# Altium PCB uku20710_pow.PcbDoc
Units mm, origin at the board's own origin, x right, y up, seen from the top; angles counter-clockwise.
Board outline 334.15 x 155.4 mm, 2 copper layers (Top Layer, Bottom Layer); 83 components, 590 nets, 251 pads, 79 vias.
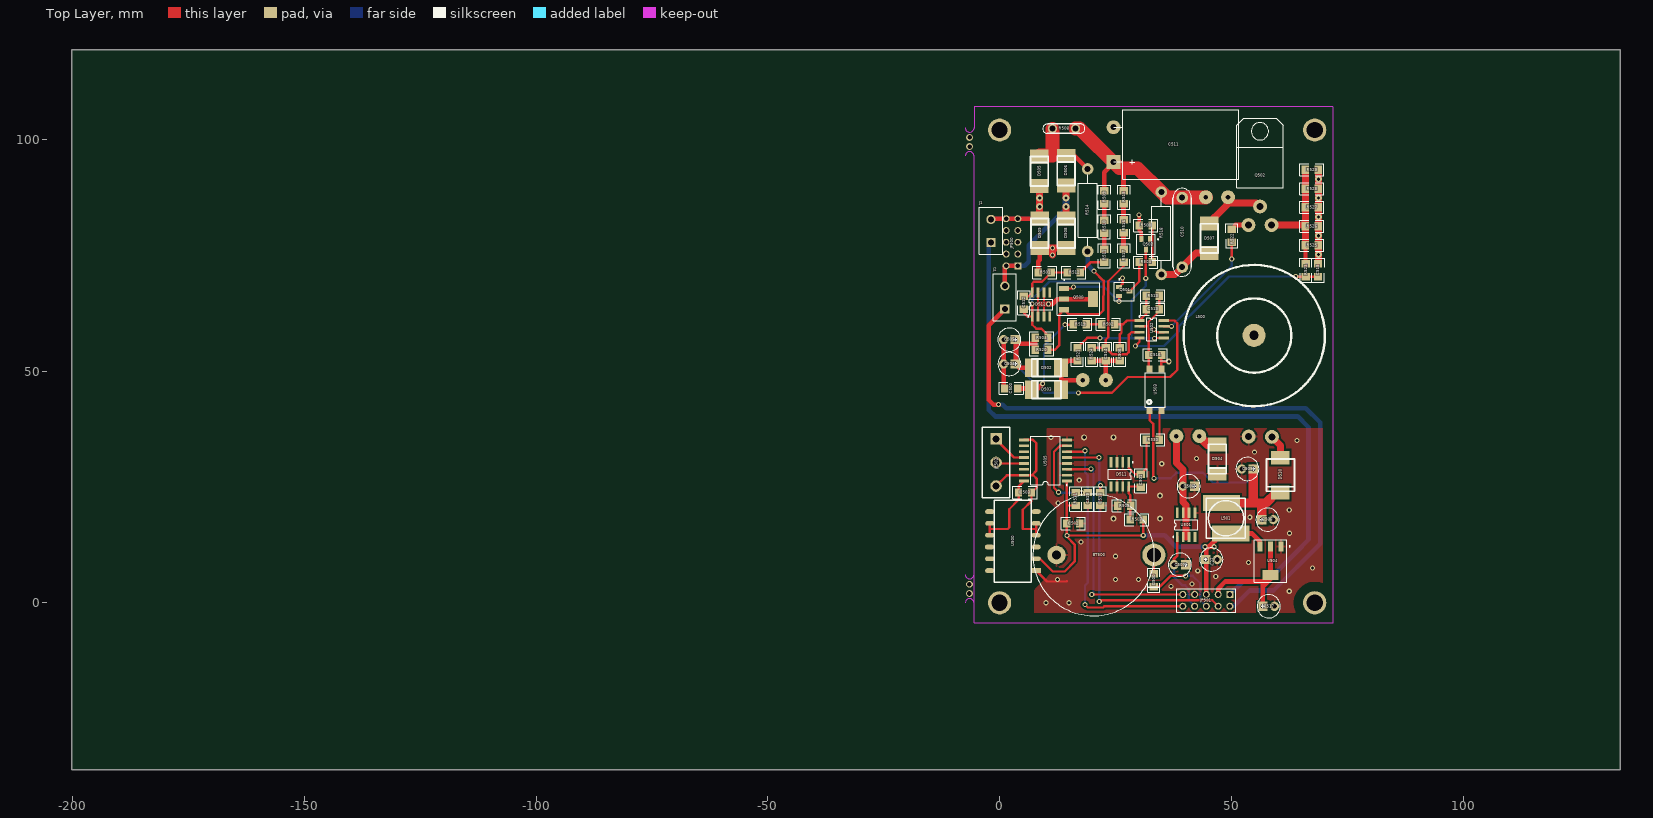
[diagram p0: Top Layer view]
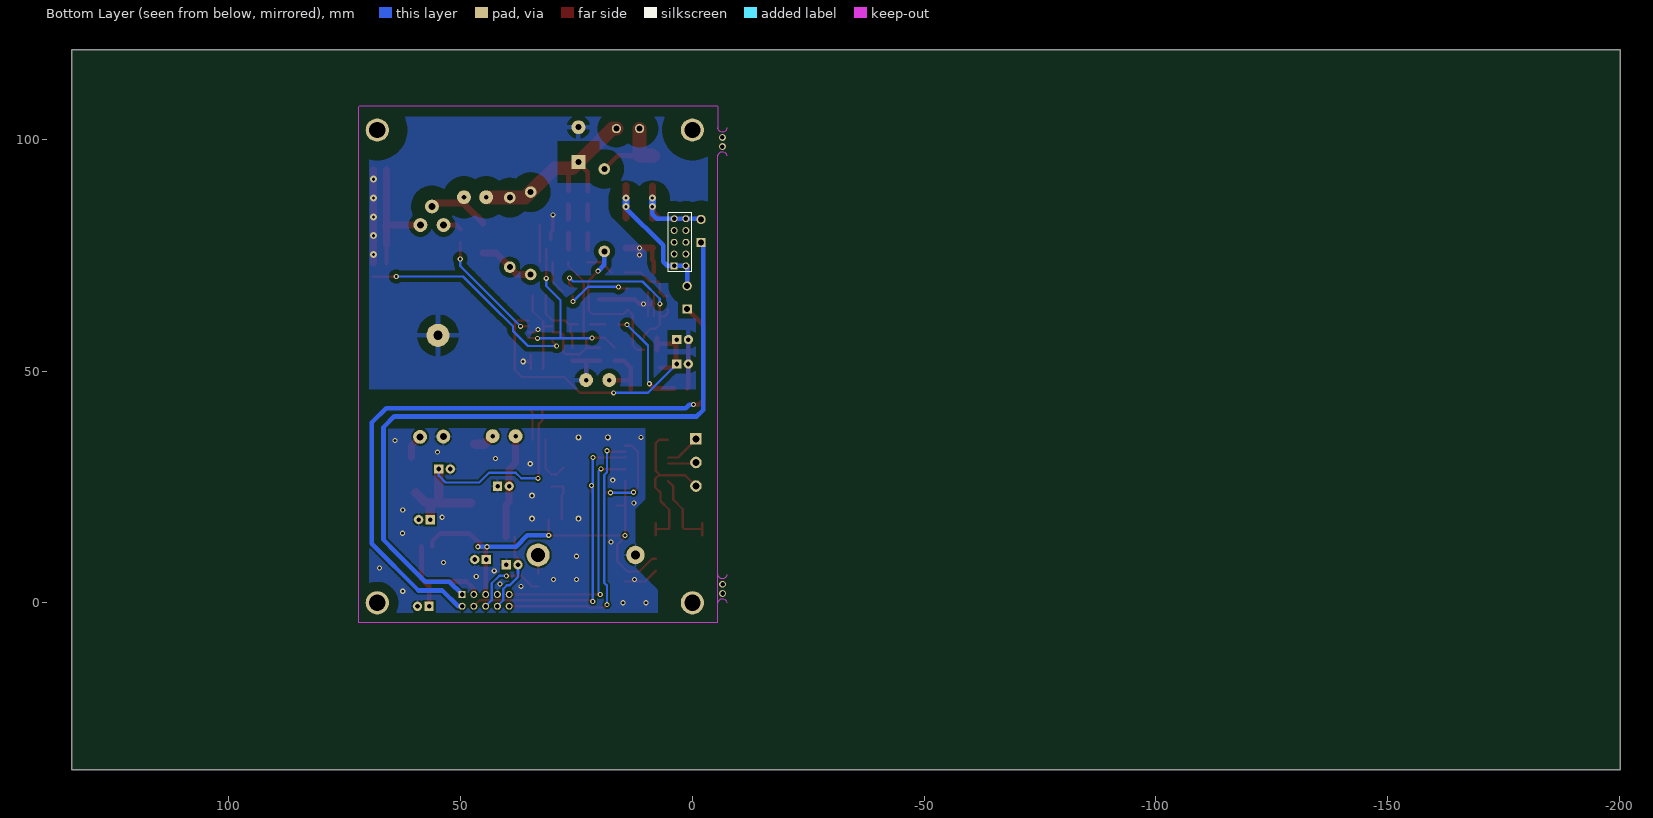
[diagram p1: Bottom Layer view, seen from below]

## Layer stack, top to bottom
Top Layer: signal copper 0.0356
Dielectric: dielectric 0.32, FR-4, Dk 4.8
Bottom Layer: signal copper 0.0356

## Board outline
-200.203,119.35 -200.203,-36.05 133.947,-36.05 133.947,119.35

## Design rules (kind name [scope] priority, off if disabled: settings)
Clearance Keep_Out [OnLayer('Keep-Out Layer') vs not OnLayer('Top Overlay')] p1: gap=2
Clearance Clearance_2 [InNet('NetD506_1') or
InNet('NetD505_2') or
InNet('NetC510_2') or
InNet('NetD505_1') or
InNet('NetD507_1') vs InPoly] p2: gap=3
Clearance Clearance_4 [InNet(NetC500_1) vs HasPad('Free-0')] p3: gap=4
Clearance Holes [InPoly vs HasPad('Free-0') Or HasPad('Free-1') Or HasPad('Free-2') Or HasPad('Free-3')] p4: gap=2
Clearance Clearance_3 [InPoly and InNet(NetC500_1)] p5: gap=1
Clearance Poly [InPoly] p6: gap=0.4
Clearance [All] p7: gap=0.18
ComponentClearance [All] p1: gap=0.254 collisioncheckmode=0
HoleSize [All] p1: absolutevalues=TRUE maxlimit=5 minlimit=0.025 maxpercent=80.000 minpercent=20.000
PolygonConnect PolygonConnect_2 [InNet('NetC500_1')] p1: connectstyle=Relief reliefconductorwidth=1 reliefentries=4 polygonreliefangle="90 Angle"
PolygonConnect PolygonConnect_1 [InNet(NetC100_2)] p2: connectstyle=Direct reliefconductorwidth=0.254 reliefentries=4 polygonreliefangle="90 Angle"
PolygonConnect [All] p3: connectstyle=Relief reliefconductorwidth=0.4 reliefentries=4 polygonreliefangle="90 Angle"
RoomDefinition UKU20710_power_board [InComponentClass('UKU20710_power_board')] p1: confinementstyle=ConfineIn formatcopy=TRUE outline -229.903,-36.6 -179.103,-36.6 -179.103,-11.2 -229.903,-11.2
RoutingLayers [All] p1: top layer=Horizontal bottom layer=Vertical
RoutingVias [All] p1: holewidth=0.6 width=1.1 viastyle="Through Hole" minholewidth=0.6 minwidth=1.1 maxholewidth=0.7 maxwidth=1.2
SolderMaskExpansion [All] p1: expansion=0.102
TestPointUsage [All] p1: valid=0 allowmultiple=FALSE
Testpoint [All] p1: side=15 testpointundercomponent=TRUE minsize=1.016 maxsize=2.54 preferedsize=1.524 minholesize=0 maxholesize=1.016 preferedholesize=0.813 testpointgrid=0.025 style=1023 order=-539222988
Width [All] p1: maxlimit=5 minlimit=0.2 preferedwidth=0.254 toplayer_prefwidth=0.5 bottomlayer_prefwidth=1 minimp=50.000000 maximp=50.000000 favimp=50.000000
15 further rules are at their usual default settings.

## Components (designator, comment, footprint, x,y, rotation, side; value= is the part's Value field where it differs from the comment)
BT500 "CR2032" BAT_SUPP 20.3,10.3 r270 top
C27 "nichicon 330x16" el3 44.45,9.35 r0 top (schematic designator C?)
C500 "1.0" _1206#1 2.5,46.25 r0 top
C501 "0.1" _1206#1 30.45,26.35 r90 top
C502 "22.0" _1206#2 15.9,17.1 r180 top
C503 "22.0" _1206#2 5.5,23.8 r0 top
C504 "LXZ 22.0x50" el3 3.396,51.513 r180 top
C505 "LXZ 22.0x50" el3 3.388,56.773 r180 top
C506 "LXZ 22.0x50" el3 42.05,25.15 r180 top
C507 "LXZ 22.0x50" el3 40.157,8.203 r180 top
C508 "nichicon 330x16" el3 56.55,17.95 r0 top
C509 "nichicon 330x16" el3 54.75,28.866 r180 top
C510 "0.1x630" c15 39.406,79.921 r90 top
C511 "10.0x450" el_15_25_h 24.6,98.85 r270 top
C512 "10n" _1206#1 5.25,64.75 r90 top
C513 "390" _1206#1 33.054,63.367 r0 top
C514 "1n0" _1206#1 22.9,53.6 r270 top
C515 "1n0" _1206#1 68.697,71.75 r90 top
C516 "3n3" _1206#1 33.554,53.465 r180 top
C517 "LXZ 220x16" el3 56.811,-0.749 r0 top
C518 "1n0" _1206#2 21.75,22.4 r90 top
C519 "1.0" _1206#2 19.05,22.4 r90 top
D500 "LL4148" _1206d 33.25,4.9 r90 top
D502 "MBRS1100T3G" D_6_3 6.95,50.7 r0 top
D503 "MBRS1100T3G" D_6_3 6.95,46 r0 top
D504 "MBRS1100T3G" D_6_3 47,27.85 r90 top
D505 "STTH112" D_6_3 8.598,96.275 r270 top
D506 "STTH112" D_6_3 14.35,96.375 r270 top
D507 "STTH112" D_6_3 45.25,75.45 r90 top
D508 "STTH112" D_6_3 14.35,82.9 r270 top
D509 "STTH112" D_6_3 8.648,82.872 r270 top
D510 "30BQ100" 30BQ100 60.6,27.55 r90 top
D511 "TL431ACD" SO-G8 25.95,27.7 r180 top
D512 "TL431ACD" SO-G8 8.947,64.367 r0 top
J1 "" BT5-2 -1.85,77.7 r90 top
J2 "" BT5-2 1.142,63.356 r90 top
JP500 "IDC-10" HDR2X5 3.95,72.7 r90 top
JP501 "PLHD-10" HDR2X5 49.697,1.8 r180 top
JP502 "Header 3" 2EDG-5.08-3P -0.75,35.35 r270 top
L500 "L220-K10" trans_ring1 54.95,57.65 r0 top
L501 "SDR0805-390KL" L10x10 53.96,23.307 r180 top
Q500 "NSS40300MZ4" DSO-G3 17.05,65.518 r270 top
Q501 "BC856" SO-G3 26.9,67.15 r270 top
Q502 "STP4NK80Z" TO220_h 56.197,97 r0 top
Q503 "BC846" SO-G3 31.55,77.35 r180 top
R500 "33K" _1206#1 31.55,81.4 r0 top
R501 "2K7" _1206#1 9.748,71.262 r0 top
R502 "6K2" _1206#1 23.45,60.1 r180 top
R503 "2K2" _1206#1 9.05,57.15 r180 top
R504 "2K2" _1206#1 31.548,73.5 r180 top
R505 "2K2" _1206#1 26.9,20.95 r180 top
R506 "2K2" _1206#1 25.95,53.65 r90 top
R507 "2K2" _1206#1 29.597,17.95 r180 top
R508 "NTC 50R 10" JVR07N 16.4,102.3 r180 top
R509 "M10" _1206#1 22.608,87.473 r90 top
R510 "M10" _1206#1 22.608,81.172 r90 top
R511 "M10" _1206#1 22.608,74.87 r90 top
R512 "M10" _1206#1 16.05,71.262 r0 top
R513 "M10" _1206#1 33.054,66.268 r180 top
R514 "M24" AXIAL-0.7 19,84.7 r90 top
R515 "1M" _1206#1 26.797,87.473 r90 top
R516 "1M" _1206#1 26.797,81.27 r90 top
R517 "1M" _1206#1 26.797,74.87 r90 top
R518 "39K" AXIAL-0.7 34.905,79.721 r270 top
R519 "5K1" _1206#1 17.35,60.116 r0 top
R520 "3R" _1206#1 9.05,54.6 r180 top
R521 "51K" _1206#1 16.8,53.665 r90 top
R522 "10" _1206#1 50.1,79.15 r270 top
R523 "K56" _1206#1 66.049,71.75 r270 top
R524 "18K" _1206#1 19.85,53.65 r90 top
R525 "6R8" _1206#1 67.404,77.179 r0 top
R526 "6R8" _1206#1 67.404,81.243 r0 top
R527 "6R8" _1206#1 67.404,85.306 r0 top
R528 "6R8" _1206#1 67.404,89.37 r0 top
R529 "6R8" _1206#1 67.404,93.433 r0 top
R530 "K18" _1206#1 33.1,35.15 r0 top
R531 "10K" _1206#2 16.4,22.4 r90 top
U500 "SBT01L-05" SBT01DET01 7.897,6.95 r90 top
U501 "L79L05ACD" SO-G8 40.257,16.805 r0 top
U502 "L6565" so-g8 32.804,59.016 r270 top
U503 "FOD817ASD" FOD817ASD 32.4,41.45 r0 top
U504 "REG1117-3.3" DSO-G3 58.45,9.05 r180 top
U505 "ADM2483" SO-G16/D10.4 9.897,30.7 r90 top

## Footprints (in the part's own frame and the unit in brackets; to place one, negate y for a bottom-side part, rotate by r counter-clockwise, add the part's x,y. Pads: shape width x height; smd on the part's side, far side on the other; paste and mask are expansions set on the pad)
2EDG-5.08-3P [mm]
  rect 2.5x2.5 hole 1.5: 1(0,0)
  round 2.5 hole 1.5: 2(5.08,0) 3(10.16,0)
  silkscreen extent -2.5,-3 12.7,3
30BQ100 [mm]
  rect 3x4 smd: 1(3.75,0) 2(-3.75,0)
  silkscreen extent -3.5,-3 3.5,3
_1206#1 [mm]
  rect 1.6x1.8 smd: 1(-1.408,-0.007) 2(1.392,-0.007)
  silkscreen extent -2.61,-1.31 2.59,1.29
_1206#2 [mm]
  rect 1.6x1.8 smd: 1(-1.412,-0.007) 2(1.388,-0.007)
  silkscreen extent -2.61,-1.31 2.59,1.29
_1206d [mm]
  rect 1.6x1.8 smd: 1(1.397,-0.001) 2(-1.403,-0.001)
  silkscreen extent -2.6,-1.3 2.6,1.3
AXIAL-0.7 [mm]
  round 2.5 hole 1.3: 1(-8.887,-0.008) 2(8.893,-0.008)
  silkscreen extent -7.62,-2.04 7.62,2.02
BAT_SUPP [mm]
  round 5 hole 3: 1(-0.009,12.995)
  round 4 hole 2: 2(-0.009,-8.005)
  silkscreen extent -13.11,-13.1 13.09,13.09
BT5-2 [mm]
  rect 2x2 hole 1.3: 1(0.006,0.008)
  round 2 hole 1.3: 2(5.006,0.008)
  silkscreen extent -2.49,-2.49 7.61,2.51
c15 [mm]
  round 2.5 hole 1.3: 1(-7.5,0) 2(7.5,0)
  silkscreen extent -9.48,-2 9.48,2
D_6_3 [mm]
  rect 3x4 smd: 1(6.341,0.006) 2(-0.009,0.006)
  silkscreen extent -0.01,-1.9 6.34,1.91
DSO-G3 [mm]
  rect 1.1x2.15 smd: 1(-2.3,-3.1) 2(0,-3.1) 3(2.3,-3.1)
  rect 3.5x2.15 smd: 4(0,3.1)
  silkscreen extent -4.27,-4.6 3.5,4.6
el3 [mm]
  rect 2x2 hole 1: 1(0.011,-0.008)
  round 2 hole 1: 2(2.511,-0.008)
  silkscreen extent -1.23,-2.51 3.76,2.49
el_15_25_h [mm]
  rect 3x3 hole 1.3: 1(3.75,0)
  round 3 hole 1.3: 2(-3.75,0)
  silkscreen extent -7.5,0 7.5,27
FOD817ASD [mm]
  rect 1.3x1.5 smd: 1(0,0) 2(2.5,0) 3(2.5,9) 4(0,9)
  silkscreen extent -0.97,0.75 3.4,8.22
HDR2X5 [mm]
  rect 1.5x1.5 hole 1: 1(0,0)
  round 1.5 hole 1: 2(0,2.54) 3(2.54,0) 4(2.54,2.54) 5(5.08,0) 6(5.08,2.54) 7(7.62,0) 8(7.62,2.54) 9(10.16,0) 10(10.16,2.54)
JVR07N [mm]
  round 2 hole 1.3: 1(-0.004,-0.002) 2(4.996,-0.002)
  silkscreen extent -2.02,-1.02 7.09,1.01
L10x10 [mm]
  rect 8x3.5 smd: 1(4.075,8.372) 2(6.107,1.768)
  silkscreen extent 0.9,0.75 9.41,9.39
SBT01DET01 [mm]
  rect 1x2 smd: 1(0.007,0.007)
  oval 1x2 smd: 2(2.557,0.007) 3(5.082,0.007) 4(7.632,0.007) 4(10.182,0.007) 5(7.632,10.007) 5(10.182,9.982) 6(5.082,10.057) 7(2.557,10.007) 8(0.007,10.007) 10(12.732,0.007) 11(12.732,10.007)
  silkscreen extent -2.54,1.01 15.16,9.01
SO-G3 [mm]
  rect 0.85x1.3 smd: 1(-0.948,-1.102) 2(0.952,-1.102) 3(0.002,1.098)
  silkscreen extent -2.77,-2.15 2,2.15
SO-G8 [mm]
  rect 0.6x2.2 smd: 1(-1.905,-2.6) 2(-0.635,-2.6) 3(0.635,-2.6) 4(1.905,-2.6) 5(1.905,2.6) 6(0.635,2.6) 7(-0.635,2.6) 8(-1.905,2.6)
  silkscreen extent -2.88,-2.72 2.5,1.1
so-g8 [mm]
  rect 0.6x2.2 smd: 1(-1.905,-2.6) 2(-0.635,-2.6) 3(0.635,-2.6) 4(1.905,-2.6) 5(1.905,2.6) 6(0.635,2.6) 7(-0.635,2.6) 8(-1.905,2.6)
  silkscreen extent -2.88,-2.72 2.5,1.1
SO-G16/D10.4 [mm]
  rect 0.6x2.15 smd: 1(-4.445,-4.625) 2(-3.175,-4.625) 3(-1.905,-4.625) 4(-0.635,-4.625) 5(0.635,-4.625) 6(1.905,-4.625) 7(3.175,-4.625) 8(4.445,-4.625) 9(4.445,4.625) 10(3.175,4.625) 11(1.905,4.625) 12(0.635,4.625) 13(-0.635,4.625) 14(-1.905,4.625) 15(-3.175,4.625) 16(-4.445,4.625)
  silkscreen extent -5.42,-4.75 5.2,3.15
TO220_h [mm]
  round 3 hole 1.5: 1(-2.5,-15.5) 2(0,-11.5) 3(2.5,-15.5)
  silkscreen extent -5,-7.5 5,7.5
trans_ring1 [mm]
  round 3 hole 1: 1(-10.45,29.85) 2(-5.65,29.85) 3(-32,-9.6) 4(-37,-9.6) 5(-16.8,-21.7) 6(-11.85,-21.7)
  round 3 hole 1.5 unplated: 7(-1.2,-21.8)
  round 3 hole 1.5: 8(3.8,-21.85)
  silkscreen extent -15.24,-15.23 15.24,15.25

## Part data
BT500: library part Battery, "Multicell Battery"
C27 C504 C505 C506 C507 C508 C509 C511 C517: library part "Cap Pol1", "Polarized Capacitor (Radial)"
C500 C501 C502 C503 C510 C512 C513 C514 C515 C516 C518 C519: library part "Cap Semi", "Capacitor (Semiconductor SIM Model)"
D500: library part Diode, "Default Diode"
D502 D503 D504 D510: library part 10BQ015, "Schottky Rectifier"
D505 D506 D507 D508 D509: library part 10BQ015, "Schottky Diode"
D511 D512: "Programmable Precision Reference"
J1 J2: library part JMP, "Switch"
JP500 JP501: library part "Header 10", "Header, 10-Pin"
JP502: "Header, 3-Pin"
L500: library part L1_dc_2, "Дроссель"
L501: library part "Inductor Konstr 2", "Magnetic-Core Inductor"
Q501: library part GT109, "Bipolar transistor"
Q502: library part NMOS-2, "N-Channel Power MOSFET"
Q503: library part BC847ALT1, "General Purpose Transistor NPN Silicon"
R500 R501 R502 R503 R504 R505 R506 R507 R509 R510 R511 R512 R513 R514 R515 R516 R517 R518 R519 R520 R521 R522 R523 R524 R525 R526 R527 R528 R529 R530 R531: library part Res2, "Resistor"
R508: library part "Res Varistor", "Varistor (Voltage-Sensitive Resistor)"
U500: library part SBT01L
U501: "Negative Voltage Regulator"
U503: library part F00817ASD
U504: "800mA and 1A Low Dropout Positive Regulator 2.85V, 3.3V, 5V, and Adjustable"

## Free pads (board coordinates)
  round 5 hole 3.5: 0(0,102) 0(0,0) 0(68,102) 0(68,0)
  round 5 hole 2: 1(54.9,57.7)

## Via types
v1: diameter 1.1, hole 0.6, Top Layer to Bottom Layer, 60 vias
v2: diameter 1.5, hole 0.7, Top Layer to Bottom Layer, 9 vias
v3: diameter 1.3, hole 0.7, Top Layer to Bottom Layer, 5 vias
v4: diameter 1.5, hole 1, Top Layer to Bottom Layer, 4 vias
v5: diameter 1.2, hole 0.7, Top Layer to Bottom Layer, 1 vias

## Nets (pads, with @x,y where several pads share a name; then routed paths per layer and width w, separated by ;. In a path a pad name is that pad's centre, name@x,y a point inside that pad or via, vN(x,y) a via of type N, cw(c..) or ccw(c..) an arc to the next point about the centre after c; other vN are vias at no path point)
+1.8V: 
+3.3V: 
+3V3: 
+5V: 
+5V_IZ: 
+IAKB1: 
+IAKB2: 
-5V: 
-5V_IZ: 
-IAKB1: 
-IAKB2: 
-UOUT: 
A: JP502.1 U505.12 | length 7.8
  Top Layer w0.5: JP502.1 -0.75,35.2 3.115,31.335 U505.12
B: JP502.2 U505.13 | length 6.1
  Top Layer w0.5: JP502.2 -0.545,30.065 U505.13
BAT: 
CANH: 
CANL: 
DB0: 
DB1: 
DB2: 
DB3: 
DB4: 
DB5: 
DB6: 
DB7: 
DT1: 
DT2: 
DT3: 
DT4: 
DT5: 
GND: 
NetA1_1: 
NetA1_2: 
NetBT1_1: 
NetBT1_2: 
NetBT2_1: 
NetBT2_2: 
NetBT500_1: BT500.1 D500.1 | length 4
  Top Layer w0.5: D500.1 33.294,6.34 BT500.1
NetBT500_2: BT500.2 C27.2 C502.1 C506.1 C507.1 C508.2 C509.2 C517.2 C518.1 C519.1 D504.2 D511.2 D511.3 D511.6 D511.7 JP501.7 L500.7 R505.2 U500.1 U501.5 U504.1 U505.2 U505.4 U505.8 | length 7.6
  Top Layer w0.5: U500.1 10.247,4.6 14.447,4.6 14.497,4.65
  other v1: 10,0 14.997,0 62.497,2.5 36.997,3.55 41.497,4.05 12.497,5 25,5 30,5 46.65,5.7 42.75,6.9 67.497,7.5 53.7,8.7 24.997,10.05 17.597,13.1 62.55,15 53.997,18.45 62.497,20 12.65,21.5 17.197,26.45 35,30 42.497,31.1 54.997,32.5 64.2,35 11.1,35.7
  other v3: 24.597,18.15 34.597,18.15 34.6,23.1 18.25,35.7 24.6,35.7
NetC2_1: 
NetC2_2: 
NetC11_1: 
NetC11_2: 
NetC12_2: 
NetC14_2: 
NetC21_1: 
NetC22_1: 
NetC23_1: 
NetC27_1: C27.1 C502.2 JP501.5 L501.1 R507.1 R531.1 U500.2 U504.3 U505.1 | length 92.9
  Top Layer w0.5: U500.2 8.742,9.507 11.5,6.75 14.05,6.75 16.2,8.9 16.2,12.55 14.522,14.228 U505.1 ; 14.522,21 14.534,20.987 R531.1 ; v1@14.55,14.5 30.947,14.5 31.004,14.558 R507.1
  Top Layer w1: v1(44.35,12.1) 45.2,12.1 v1(46.3,12.1) ; JP501.5 44.617,11.517 48.035,14.935 L501.1 54.515,14.935 56.15,13.3 U504.3
  Bottom Layer w1: v1(14.547,14.5) v1@14.55,14.5 ; v1(30.997,14.55) 35.597,14.55 38.047,12.1 v1(44.35,12.1) v1(46.3,12.1)
NetC33_1: 
NetC35_2: 
NetC36_2: 
NetC37_2: 
NetC45_1: 
NetC45_2: 
NetC46_1: 
NetC46_2: 
NetC47_2: 
NetC48_1: 
NetC48_2: 
NetC49_1: 
NetC50_2: 
NetC51_2: 
NetC52_2: 
NetC53_2: 
NetC61_1: 
NetC61_2: 
NetC62_2: 
NetC63_2: 
NetC66_1: 
NetC100_1: 
NetC100_2: 
NetC101_1: 
NetC102_1: 
NetC103_1: 
NetC103_2: 
NetC104_2: 
NetC105_2: 
NetC107_1: 
NetC107_2: 
NetC110_1: 
NetC111_1: 
NetC111_2: 
NetC114_1: 
NetC117_1: 
NetC300_2: 
NetC302_1: 
NetC302_2: 
NetC500_1: C500.1 C504.2 C505.2 C511.2 C514.2 C515.2 C516.1 D508.1 D509.1 D512.2 D512.3 D512.6 D512.7 L500.3 pad.1 Q500.2 Q500.4 Q503.2 R500.1 R501.1 R506.1 R524.1 R525.2 R526.2 R527.2 R528.2 R529.2 U502.6 U503.3 | length 88.8
  Top Layer w0.5: D512.2 D512.7 ; D512.3 D512.6 ; v1(33.35,58.95) 33.919,58.381 U502.6 ; U503.3 C516.1@34.9,53.55 ; 34.9,52 36.6,52 v5(36.55,52.05) ; C516.1@34.9,53.41 C516.1
  Top Layer w0.8: v1(30.1,83.7) 30.142,83.658 30.142,80.308 30.598,79.852 Q503.2
  Top Layer w1: C505.2 0.877,46.458 C500.1 ; R501.1 8.341,73.641 8.654,73.954 D509.1 ; 8.5,64.45 11.4,64.45 12.468,65.518 Q500.4 ; R524.1 R506.1 ; C514.2 22.892,48.272 L500.3@23.002,48.163
  Top Layer w1.5: D509.1 14.328,76.531 D508.1 ; v1(11.45,75.05) v1(11.45,76.531) ; C515.2@68.797,73.302 R529.2
  Bottom Layer w0.5: v5@36.447,52.05 v5(36.55,52.05)
  other v1: 10.55,64.45
  other v2: 68.797,75.15 68.797,79.2 68.797,83.25 68.797,87.35 68.797,91.4
NetC500_2: C500.2 D503.2 R519.1 | length 22.6
  Top Layer w0.5: v1(14.1,60) 15.834,60 R519.1
  Top Layer w1: C500.2 8.293,46.243 v1(9.3,47.25) ; D503.2@6.993,46.243 D503.2@7.05,46.3
  Bottom Layer w0.5: v1(9.3,47.25) 9.6,47.55 9.6,55.5 v1(14.1,60) v1@14.05,60
NetC501_1: C501.1 D511.8 R505.1 R507.2 | length 9.8
  Top Layer w0.5: R507.2 28.204,23.245 27.855,23.595 D511.8 30.3,25.1 C501.1@30.35,25.05
NetC501_2: C501.2 D511.1 R530.1 | length 10.7
  Top Layer w0.5: 27.9,29.1 29.257,27.742 C501.2@30.104,27.742 ; C501.2 31.692,28.978 R530.1
NetC503_1: C503.1 U500.5 U505.16 | length 18.2
  Top Layer w0.5: U500.5@-2.111,14.582 -2.111,17.107 U500.5@-2.086,17.132 ; -2.111,15.9 1.75,15.9 2.1,16.25 2.1,20.2 4.112,22.212 4.112,25.095 U505.16
NetC503_2: C503.2 JP502.3 U500.4 U505.9 U505.15 | length 37.9
  Top Layer w0.5: JP502.3 1.585,27.525 7.25,27.525 8.05,26.725 8.05,24.944 6.912,23.807 6.912,21.962 5,20.05 5,15.95 5.05,15.9 7.889,15.9 ; U505.9 7.205,35.145 7.95,34.4 7.95,28.525 6.95,27.525 ; U500.4@7.889,14.582 U500.4@7.889,17.132
NetC504_1: C504.1 C505.1 D502.2 R503.2 R520.2 U502.8 | length 69
  Top Layer w0.5: v1(17,45.3) 24.25,45.3 24.95,46 27.65,48.7 36.8,48.7 38.35,50.25 38.35,60.3 37.729,60.921 U502.8
  Top Layer w1: C505.1 3.535,56.923 C504.1@3.535,51.671 ; C504.1 4.201,50.706 D502.2 ; C505.1@3.535,55.9 3.585,55.85 7.658,55.85 ; R520.2@7.658,54.542 R503.2
  Bottom Layer w0.5: C504.1 9.606,45.3 v1(17,45.3)
NetC505_1: 
NetC505_2: 
NetC506_2: C506.2 L500.5 U501.2 U501.3 U501.6 U501.7 | length 29.6
  Top Layer w0.88: 40.197,14.1 40.247,14.15 40.247,21
  Top Layer w1: 40.197,14.1 40.197,14.15
  Top Layer w1.5: L500.5 38.15,30.15 39.539,28.761 39.539,21.761 40.247,21.053 40.247,14.15
NetC507_2: C507.2 JP501.8 U501.1 | length 17.4
  Top Layer w0.6: C507.2 37.645,9.498 38.352,10.204 U501.1
  Bottom Layer w0.5: 37.647,6.25 37.647,5.553 39.45,3.75 40.05,3.75 40.8,3 40.8,0.537 JP501.8
  Bottom Layer w0.6: C507.2 37.647,6.25
NetC508_1: C508.1 C509.1 D510.2 L501.2 U503.1 | length 63.4
  Top Layer w0.5: U503.1 32.4,39.35 33.15,38.6 33.15,27.05 v1(33.35,26.85)
  Top Layer w2: L501.2 55.035,21.539 57.489,21.539 D510.2@59.7,23.75 ; C509.1 54.739,21.551 54.75,21.539 ; C508.1 56.561,21.478
  Bottom Layer w0.5: v1(33.35,26.85) 36.95,26.85 38.15,28.05 43.9,28.05 46,25.95 53.25,25.95 54.739,27.439 C509.1
NetC510_1: C510.1 D507.2 R518.2 | length 12.3
  Top Layer w1.5: R518.2 37.813,70.828 42.426,75.441 D507.2
NetC510_2: C510.2 C511.1 L500.1 R508.1 R509.2 R515.2 R518.1 | length 46.4
  Top Layer w1: R509.2@22.566,88.765 22.566,92.919 C511.1@24.597,94.95 ; R515.2@26.755,88.815 26.755,93.943
  Top Layer w3: R508.1 17.298,102.302 25.85,93.75 29.756,93.75 R518.1 36.084,87.421 44.421,87.421 L500.1
NetC511_1: 
NetC511_2: 
NetC512_1: C512.1 D512.1 Q501.1 R503.1 | length 38.5
  Top Layer w0.5: C512.1 5.257,62.543 6.033,61.767 D512.1 ; v1@7.1,64.55 v1(7.042,64.493) 7.042,60.007 7.9,59.15 9,59.15 10.458,57.692 R503.1 ; Q501.1 26.55,68.851 v1(26.55,70.1)
  Bottom Layer w0.5: v1@7.042,65.043 v1(7.042,64.493) 7.042,65.592 10.75,69.3 12.15,69.3 ; 11.4,69.3 25.75,69.3 v1(26.55,70.1)
NetC512_2: C512.2 D512.8 R501.2 R512.1 | length 12.6
  Top Layer w0.5: C512.2 6.192,66.142 7.042,66.992 7.042,68.892 7.4,69.25 9.136,69.25 R501.2 R512.1
NetC513_1: C513.1 R502.1 R506.2 R513.2 U502.1 | length 16.8
  Top Layer w0.5: R502.1 26.657,60.107 27.471,60.921 U502.1 31.646,62.363 C513.1 31.662,63.375 R513.2 ; R506.2 25.957,57.907 26.3,58.25 26.3,60.107
NetC513_2: C513.2 C516.2 R513.1 U502.2 U503.4 | length 18.8
  Top Layer w0.5: U502.2 32.151,59.651 32.2,59.7 ; C516.2 32.162,50.688 U503.4 ; C516.2@32.245,53.555 32.2,53.6 32.2,60.65 34.45,62.9 34.45,66.263 R513.1
NetC514_1: C514.1 R517.1 R524.2 U502.3 | length 35.1
  Top Layer w0.5: R524.2 22.858,55.042 24.25,53.65 27.45,53.65 27.9,54.1 27.9,57.8 28.481,58.381 U502.3 ; C514.1 22.892,56.793 23.45,57.35 23.45,69.1 23.45,69.35 26.805,72.705 R517.1
NetC515_1: C515.1 R523.2 U502.4 | length 48.6
  Top Layer w0.5: v1(29.3,55.4) 30.204,56.304 U502.4 ; v1@63.841,70.358 68.941,70.358 C515.1@68.956,70.342
  Bottom Layer w0.5: v1(29.3,55.4) 35.45,55.4 38.7,58.65 38.7,59.65 41.15,62.1 ; 41.175,62.075 49.5,70.4 v1(63.899,70.4)
NetC516_1: 
NetC516_2: 
NetC517_1: C517.1 JP501.3 U504.2 U504.4 | length 27.9
  Top Layer w1: JP501.3 47.157,3.057 48.7,4.6 57.9,4.6 ; 56.7,4.6 56.822,4.478 56.822,3 ; C517.1 56.822,3.472 58.45,5.1 U504.2
NetC518_2: C518.2 JP501.4 U505.5 | length 65.8
  Top Layer w0.5: U505.5 21.435,31.335 v1(21.45,31.35) ; v1(21.5,0.3) 21.75,0.55 45.867,0.55 JP501.4 ; v1(21.75,25.3) 21.75,23.794 C518.2
  Bottom Layer w0.5: v1(21.45,31.35) 21.5,31.3 v1(21.5,0.3)
NetC519_2: C519.2 R531.2 U505.7 | length 20.1
  Top Layer w0.5: v1(12.697,23.85) 11.75,24.797 11.75,32.6 13.025,33.875 U505.7 ; R531.2 C519.2
  Bottom Layer w0.5: v1(12.697,23.85) 12.797,23.75 v1(17.697,23.75)
NetC600_1: 
NetC600_2: 
NetD1_2: 
NetD3_1: 
NetD3_2: 
NetD5_1: 
NetD20_2: 
NetD101_1: 
NetD101_2: 
NetD102_1: 
NetD103_1: 
NetD105_1: 
NetD105_2: 
NetD106_1: 
NetD116_2: 
NetD500_1: 
NetD500_2: D500.2 JP501.6 | length 17.2
  Top Layer w0.5: D500.2 34.597,3.497 36.9,5.8 v1(40.15,5.8)
  Bottom Layer w0.5: v1(40.15,5.8) 41.7,5.8 43.3,4.2 43.3,0.577 JP501.6
NetD502_1: D502.1 D503.1 L500.4 R521.1 | length 13.6
  Top Layer w1: D503.1 D502.1 14.842,52.257 R521.1 ; 13.291,48.35 13.591,48.05 L500.4
NetD503_1: 
NetD504_1: D504.1 L500.6 | length 4.6
  Top Layer w2: L500.6 44.859,34.191 D504.1
NetD505_1: D505.1 D509.2 J1.2 JP500.9 JP500.10 | length 33.9
  Top Layer w1: J1.2 -1.704,82.86 JP500.9 6.908,82.86 8.65,84.602 v2(8.65,85.45) ; D509.2@8.591,82.929 D509.2@8.648,82.872 ; D505.1@8.648,89.924 D505.1@8.698,89.974
  Top Layer w1.5: D509.2@8.648,82.872 D505.1@8.648,89.924
  Bottom Layer w1: J1.2 -1.704,82.86 JP500.9 7.71,82.86 8.65,83.8 v2(8.65,85.45)
  Bottom Layer w1.5: v2(8.648,87.35) v2(8.65,85.45)
NetD505_2: D505.2 D506.2 R508.2 R514.2 | length 19.1
  Top Layer w1: 11.4,96.5 16.1,96.5 R514.2 ; 12.105,96.385 D506.2@13.965,96.385
  Top Layer w3: D505.2@8.547,96.385 D505.2@8.554,96.391 ; D505.2@8.699,96.5 11.4,96.5 R508.2@11.4,102.2
NetD506_1: D506.1 D508.2 J2.2 JP500.1 JP500.2 | length 39
  Top Layer w1: J2.2@1.142,68.356 1.142,72.432 JP500.2 JP500.1 ; D506.1@14.3,90.074 D506.1@14.35,90.074
  Top Layer w1.5: D508.2@14.35,82.972 v2(14.35,85.45) ; v2(14.35,87.35) D506.1@14.35,90.035
  Bottom Layer w1: J2.2@1.142,68.356 1.142,72.492 1.35,72.7 JP500.1 5.4,72.7 6.3,73.6 6.3,77.1 14.35,85.15 v2(14.35,85.45)
  Bottom Layer w1.5: v2(14.35,85.45) v2(14.35,87.35)
NetD507_1: D507.1 L500.2 Q502.2 | length 14.7
  Top Layer w1.5: D507.1 45.244,82.044 48.053,84.853 49.5,86.3 55.397,86.3 Q502.2 ; L500.2 49.3,86.2 L500.2@49.35,86.15
NetD510_1: D510.1 L500.8 | length 5.3
  Top Layer w1.5: L500.8 60.6,33.95 D510.1
NetDS1_1: 
NetDS1_2: 
NetFU100_1: 
NetFU500_1: 
NetJ1_1: J1.1 JP501.1 | length 153.1
  Bottom Layer w1: J1.1 -2.35,77.214 -2.35,41.6 -0.95,40.2 64.35,40.2 66.65,37.9 66.65,13.6 64.1,11.05 ; JP501.1@49.697,1.653 JP501.1 52.447,4.55 57.65,4.55 64.125,11.025
NetJ1_2: 
NetJ1_3: 
NetJ1_4: 
NetJ1_5: 
NetJ1_7: 
NetJ2_1: J2.1 JP501.2 | length 145.7
  Top Layer w1: v1(-0.2,42.75) -1.3,42.75 -2.3,43.75 -2.3,59.914 J2.1@1.142,63.356
  Bottom Layer w1: v1(-0.2,42.75) -0.15,42.7 0.7,42.7 1.45,41.95 66.1,41.95 69.15,38.9 69.15,12.7 59.1,2.65 53.95,2.65 50.56,-0.74 JP501.2@49.66,-0.74
NetJ301_1: 
NetJ301_2: 
NetJ301_3: 
NetJ301_6: 
NetJ301_10: 
NetJ301_11: 
NetJ600_1: 
NetJP1_2: 
NetJP2_2: 
NetJP3_1: 
NetJP3_2: 
NetJP3_3: 
NetJP3_3: 
NetJP3_3: 
NetJP3_4: 
NetJP3_5: 
NetJP3_6: 
NetJP3_7: 
NetJP5_5: 
NetJP5_6: 
NetJP5_7: 
NetJP5_9: 
NetJP5_10: 
NetJP5_11: 
NetJP5_12: 
NetJP7_2: 
NetJP7_3: 
NetJP7_4: 
NetJP7_5: 
NetJP7_6: 
NetJP7_7: 
NetJP8_1: 
NetJP8_2: 
NetJP8_3: 
NetJP8_4: 
NetJP9_1: 
NetJP11_1: 
NetJP12_3: 
NetJP12_4: 
NetJP501_9: JP501.9 U505.3 | length 52.5
  Top Layer w0.5: U505.3 19.729,28.795 v1@19.792,28.858 ; v1(19.9,1.8) 19.9,1.75 19.95,1.8 JP501.9
  Bottom Layer w0.5: v1(19.75,28.9) 20.25,28.4 20.25,2.15 v1(19.9,1.8)
NetJP501_10: 
NetJP501_10: JP501.10 U505.6 | length 59.1
  Top Layer w0.5: U505.6 18.255,32.605 v1(18.45,32.8) ; v1(18.45,-0.4) 19.05,-1 22.35,-1 22.61,-0.74 JP501.10
  Bottom Layer w0.5: v1(18.45,-0.4) 18.45,3.7 19.05,4.3 19.05,27.55 18.45,28.15 v1(18.45,32.8)
NetL500_10: 
NetQ1_1: 
NetQ1_2: 
NetQ2_1: 
NetQ2_3: 
NetQ4_1: 
NetQ5_2: 
NetQ6_1: 
NetQ7_2: 
NetQ7_4: 
NetQ8_2: 
NetQ8_4: 
NetQ9_2: 
NetQ9_4: 
NetQ10_1: 
NetQ10_3: 
NetQ10_3: 
NetQ11_1: 
NetQ11_1: 
NetQ11_3: 
NetQ500_1: Q500.1 Q501.2 | length 14.5
  Top Layer w0.5: Q500.1 15.617,67.818 v1(15.95,68.15) ; v1(25.75,65) 25.798,65.048 Q501.2
  Bottom Layer w0.5: v1(15.95,68.15) 16,68.2 22.55,68.2 v1(25.75,65)
NetQ500_3: Q500.3 R514.1 R520.1 | length 34.2
  Top Layer w0.5: R520.1 11.957,54.607 12.85,55.5 12.85,62.118 Q500.3 14.868,62.3 21.6,62.3 22.4,63.1 22.45,69.45 v1(20.35,71.55)
  Bottom Layer w1: R514.1 19.007,72.893 v1(20.35,71.55)
NetQ501_1: 
NetQ501_3: Q501.3 R504.2 | length 7.3
  Top Layer w0.5: Q501.3 28.606,67.757 30.156,69.307 R504.2
NetQ502_1: Q502.1 R522.1 | length 4.1
  Top Layer w1: R522.1@50,80.6 50.9,81.5 Q502.1
NetQ502_3: Q502.3 R523.1 R525.1 R526.1 R527.1 R528.1 R529.1 | length 26.6
  Top Layer w0.8: R525.1 65.997,73.202 R523.1
  Top Layer w1.5: Q502.3@58.85,81.55 64.707,81.525 ; R525.1 R529.1
  Top Layer w2: R526.1@65.707,81.526 R526.1
NetQ503_1: Q503.1 R500.2 R504.1 | length 7.9
  Top Layer w0.6: R500.2 32.956,81.379 R504.1
NetQ503_3: Q503.3 R521.2 U502.5 | length 41.5
  Top Layer w0.5: R521.2 18.95,57.2 21.6,57.2 v1(21.65,57.15) ; v1(31.548,70.002) Q503.3 ; v1(33.4,57.05) 33.461,57.111 U502.5
  Bottom Layer w0.5: v1(21.65,57.15) 21.75,57.05 v1(33.4,57.05) ; 28.45,57.05 28.45,65.2 ; 28.45,63.75 28.45,65.25 31.548,68.348 v1(31.548,70.002)
NetQ600_1: 
NetQ600_3: 
NetR3_1: 
NetR3_2: 
NetR3_2: 
NetR3_2: 
NetR3_2: 
NetR3_2: 
NetR3_2: 
NetR3_2: 
NetR4_1: 
NetR4_2: 
NetR5_1: 
NetR5_2: 
NetR6_1: 
NetR6_2: 
NetR7_1: 
NetR7_2: 
NetR7_2: 
NetR8_1: 
NetR8_1: 
NetR8_2: 
NetR8_2: 
NetR14_2: 
NetR20_1: 
NetR22_2: 
NetR22_2: 
NetR22_2: 
NetR22_2: 
NetR22_2: 
NetR22_2: 
NetR22_2: 
NetR22_2: 
NetR22_2: 
NetR25_1: 
NetR30_2: 
NetR38_1: 
NetR42_1: 
NetR42_2: 
NetR43_1: 
NetR43_2: 
NetR43_2: 
NetR44_1: 
NetR44_2: 
NetR44_2: 
NetR45_2: 
NetR49_1: 
NetR49_2: 
NetR51_1: 
NetR51_2: 
NetR52_1: 
NetR53_1: 
NetR57_1: 
NetR60_1: 
NetR69_2: 
NetR83_1: 
NetR86_1: 
NetR90_2: 
NetR91_1: 
NetR95_1: 
NetR96_2: 
NetR104_1: 
NetR104_2: 
NetR105_2: 
NetR110_1: 
NetR110_2: 
NetR112_1: 
NetR113_1: 
NetR114_1: 
NetR115_1: 
NetR116_1: 
NetR117_2: 
NetR120_1: 
NetR305_2: 
NetR306_2: 
NetR502_2: R502.2 R519.2 | length 3.3
  Top Layer w0.5: R519.2 22.056,60.109 R502.2
NetR504_1: 
NetR505_2: 
NetR505_2: 
NetR509_1: R509.1 R510.2 | length 3.5
  Top Layer w1: R510.2@22.566,82.464 R509.1@22.566,85.965
NetR510_1: R510.1 R511.2 | length 3.5
  Top Layer w1: R511.2@22.566,76.162 R510.1@22.566,79.664
NetR511_1: R511.1 R512.2 | length 6.1
  Top Layer w0.6: R512.2 19.65,73.462 R511.1
NetR515_1: R515.1 R516.2 | length 3.4
  Top Layer w1: R516.2@26.755,82.612 R515.1@26.755,86.015
NetR516_1: R516.1 R517.2 | length 3.6
  Top Layer w1: R517.2@26.755,76.212 R516.1@26.755,79.812
NetR522_2: R522.2 U502.7 | length 26.8
  Top Layer w0.5: U502.7 v1(37.099,59.651) ; 50.093,76.143 R522.2 50.1,77.75 v1(50.1,74.2)
  Bottom Layer w0.5: v1(37.099,59.651) 50.1,72.652 v1(50.1,74.2)
NetR530_2: R530.2 U503.2 | length 6.5
  Top Layer w0.5: R530.2 34.492,41.042 U503.2
NetR600_1: 
NetR600_2: 
NetR603_1: 
NetR603_2: 
NetR605_2: 
NetS2_1: 
NetU1_1: 
NetU1_4: 
NetU1_5: 
NetU3_13: 
NetU3_14: 
NetU3_16: 
NetU5_1: 
NetU8_3: 
NetU8_7: 
NetU8_8: 
NetU11_5: 
NetU14_3: 
NetU14_4: 
NetU14_5: 
NetU14_6: 
NetU14_12: 
NetU14_13: 
NetU14_14: 
NetU15_3: 
NetU15_3: 
NetU15_3: 
NetU15_3: 
NetU15_4: 
NetU15_5: 
NetU15_5: 
NetU15_5: 
NetU15_5: 
NetU15_5: 
NetU15_5: 
NetU15_7: 
NetU15_7: 
NetU15_9: 
NetU15_10: 
NetU15_15: 
NetU16_3: 
NetU16_4: 
NetU16_6: 
NetU19_4: 
NetU21_1: 
NetU21_2: 
NetU103_4: 
NetU503_4: 
NetU600_3: 
NetX11_1: 
NetX13_1: 
NetX15_1: 
NetX19_1: 
NetX23_1: 
NetX32_1: 
NetX33_1: 
OFF1: 
OFF2: 
P0_0: 
P0_1: 
P0_2: 
P0_2: 
P0_2: 
P0_2: 
P0_2: 
P0_2: 
P0_3: 
P0_3: 
P0_3: 
P0_3: 
P0_3: 
P0_3: 
P0_3: 
P0_4: 
P0_5: 
P0_6: 
P0_7: 
P0_8: 
P0_8: 
P0_8: 
P0_8: 
P0_8: 
P0_8: 
P0_8: 
P0_8: 
P0_8: 
P0_8: 
P0_8: 
P0_8: 
P0_8: 
P0_8_: 
P0_8_: 
P0_8_: 
P0_9: 
P0_9: 
P0_9: 
P0_9_: 
P0_9_: 
P0_9_: 
P0_9_: 
P0_10: 
P0_11: 
P0_13: 
P0_15: 
P0_16: 
P0_17: 
P0_18: 
P0_19: 
P0_19: 
P0_20: 
P0_21: 
P0_23: 
P0_24: 
P0_25: 
P0_25: 
P0_25: 
P0_25: 
P0_25: 
P0_25: 
P0_25: 
P0_25: 
P0_25: 
P0_25: 
P0_25: 
P0_27: 
P0_27: 
P0_27: 
P0_27: 
P0_27: 
P0_27: 
P0_27: 
P0_27: 
P0_27: 
P0_27: 
P0_27: 
P0_27: 
P0_27: 
P0_28: 
P0_29: 
P0_30: 
P1_0: 
P1_1: 
P1_4: 
P1_8: 
P1_9: 
P1_10: 
P1_14: 
P1_15: 
P1_16: 
P1_17: 
P1_18: 
P1_19: 
P1_20: 
P1_21: 
P1_21: 
P1_22: 
P1_22: 
P1_22: 
P1_22: 
P1_22: 
P1_22: 
P1_22: 
P1_22: 
P1_23: 
P1_24: 
P1_25: 
P1_25: 
P1_25: 
P1_25: 
P1_25: 
P1_25: 
P1_26: 
P1_27: 
P1_28: 
P1_29: 
P1_29: 
P1_29: 
P1_29: 
P1_29: 
P1_30: 
P1_31: 
P1_31: 
P1_31: 
P1_31: 
P1_31: 
P1_31: 
P1_31: 
P1_31: 
P1_31: 
P1_31: 
P1_31: 
P1_31: 
P1_31: 
P1_31: 
P2_0: 
P2_1: 
P2_7: 
P2_8: 
P2_9: 
P2_10: 
P2_13: 
P3_25: 
P3_26: 
PB1: 
PB1: 
PB2: 
PB2: 
PB3: 
PB3: 
PE6: 
PE6: 
PE7: 
PQ3: 
PQ4: 
PQ5: 
PQ6: 
PROG0: 
PROG1: 
PROG1: 
PROG1: 
PWM: 
PWM1: 
PWM2: 
REL1: 
REL1: 
REL2: 
REL3: 
REL4: 
REL5: 
REL6: 
RES: 
RX: 
RXCAN: 
SK1: 
SK2: 
SK3: 
SK4: 
T3: 
T3: 
TD1: 
TX: 
U2: 
U5: 
U6: 
U7: 
U8: 
UAKB: 
UB1: 
UB2: 
UBM1: 
UBM2: 
UIB1: 
UIB2: 
ULOAD: 
US: 
US1: 
US1: 
US1: 
US1: 
US1: 
US1: 
US1: 
US1: 
US1: 
UU1: 
UU2: 
UU3: 
UU4: 
UU5: 
UU6: 
UU7: 
UU8: 
UU9: 
UU10: 
UU11: 
UU12: 
UU13: 
UU14: 
VBAT: 
VREF: 
VS: 
VS: 
WD_RES: 
pads on no net: D511.4 D511.5 D512.4 D512.5 JP500.3 JP500.4 JP500.5 JP500.6 JP500.7 JP500.8 U500.3 U500.6 U500.7 U500.8 U500.10 U500.11 U501.4 U501.8 U505.10 U505.11 U505.14
copper on no net:
  other v4: -6.5,2 -6.5,4 -6.45,98.4 -6.45,100.4

## Polygon pours and split planes (outlines as drawn)
NetBT500_2 on Top Layer (hatched 90Degree grid 0.1 track 0.3, remove dead copper): 10.25,37.55 10.25,22.4 12.3,20.35 12.3,7.45 7.5,2.65 7.5,-6.15 77.5,-6.15 77.5,37.5 10.25,37.5
NetC500_1 on Bottom Layer (hatched 90Degree grid 0.1 track 0.3, remove dead copper): -7.55,109.8 -7.55,46.15 73.5,46.15 73.5,109.2 -7.55,109.2
NetBT500_2 on Bottom Layer (hatched 90Degree grid 0.1 track 0.3, remove dead copper): 10.25,37.55 10.25,22.4 12.3,20.35 12.3,7.45 7.5,2.65 7.5,-6.15 77.5,-6.15 77.5,37.5 10.25,37.5

## Keep-outs
Keep-Out Layer:
  lines w0.25: -7.409,-0.002 cw(c-6.45,-0.05) -5.491,0.003 ; -7.409,6.047 ccw(c-6.45,6.1) -5.491,6.052 ; -7.409,96.398 cw(c-6.45,96.35) -5.491,96.403 ; -7.409,102.447 ccw(c-6.45,102.5) -5.491,102.452 ; -5.506,5.901 -5.506,96.524 ; -5.506,103.326 -5.505,103.327 ; -5.5,20 -5.5,-4.35 71.95,-4.35 71.95,107 ; -5.5,102.35 -5.5,107 ; -5.5,107.1 71.9,107.1

## Silkscreen, mask and mechanical layers (free items; w line width, h text height)
Mechanical 1:
  lines w0.25: 49.7,-1.84 51.54,0 68,0